# Altium PCB RisPardazandeh Tester PCB.PcbDoc
Units mm, origin at the board's own origin, x right, y up, seen from the top; angles counter-clockwise.
Board outline 66.09 x 97.03 mm, 2 copper layers (Top Layer, Bottom Layer); 46 components, 58 nets, 224 pads, 1 vias.
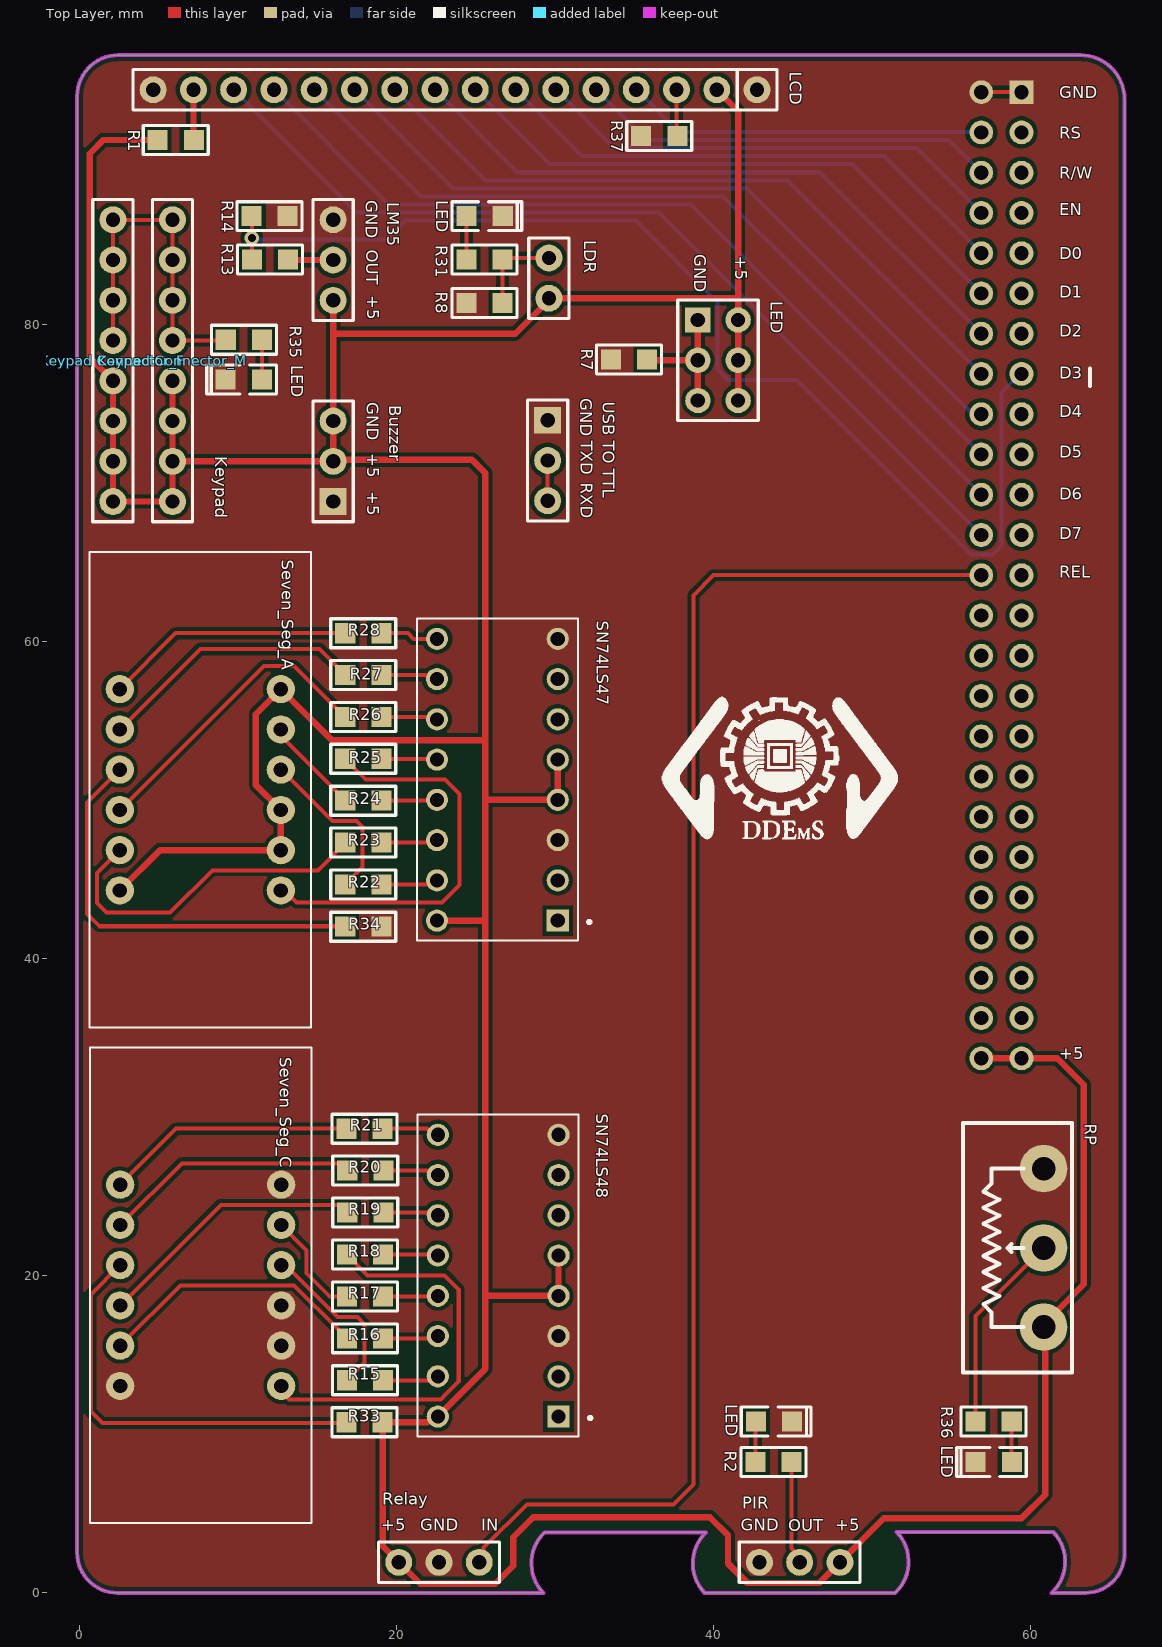
[diagram p0: Top Layer view]
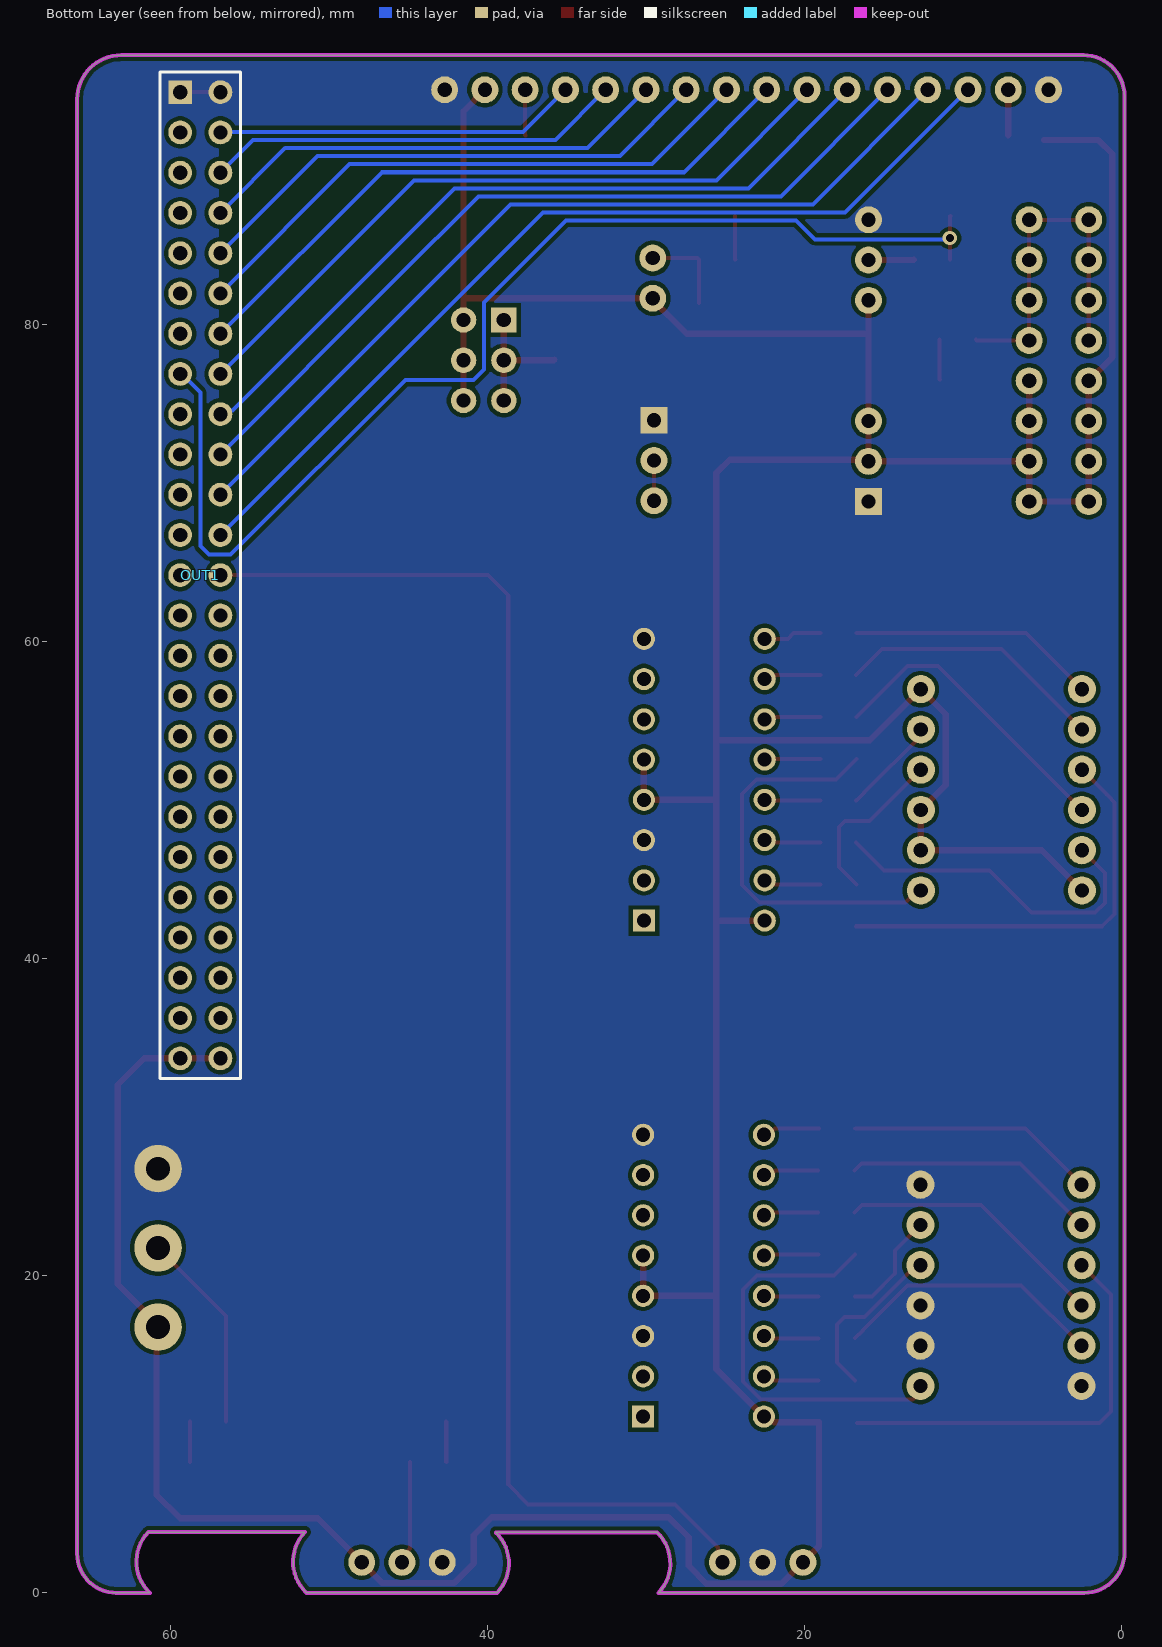
[diagram p1: Bottom Layer view, seen from below]

## Layer stack, top to bottom
Top Solder: solder mask 0.0102, Solder Resist, Dk 3.5
Top Layer: signal copper 0.0356
Dielectric 1: dielectric 0.32, FR-4, Dk 4.8
Bottom Layer: signal copper 0.0356
Bottom Solder: solder mask 0.0102, Solder Resist, Dk 3.5

## Board outline
2.368,0 29.235,0 cw(c31.178,1.867) 29.312,3.81 39.497,3.81 ccw(c41.364,1.867) 39.421,0 51.435,0 51.46,0.025 ccw(c49.593,1.968) 51.537,3.835 61.417,3.835 cw(c59.474,1.968) 61.341,0.025 61.316,0 63.449,0 63.432,0 ccw(c63.432,2.481) 65.913,2.481 65.913,94.243 ccw(c63.128,94.243) 63.128,97.028 2.423,97.028 ccw(c2.423,94.427) -0.178,94.427 -0.178,2.546 ccw(c2.368,2.546)

## Design rules (kind name [scope] priority, off if disabled: settings)
Clearance [All] p1: gap=0.254 ignorepadtopadclearanceinfootprint=FALSE
PolygonConnect PolygonConnect_4 [All vs IsNamedPolygon('GND_L02_P003')] p1: connectstyle=Direct reliefconductorwidth=0.254 reliefentries=4 polygonreliefangle="90 Angle" airgapwidth=0.254
PolygonConnect PolygonConnect_3 [All vs IsNamedPolygon('GND_L01_P002')] p2: connectstyle=Direct reliefconductorwidth=0.254 reliefentries=4 polygonreliefangle="90 Angle" airgapwidth=0.254
PolygonConnect PolygonConnect_2 [All vs IsNamedPolygon('NONET_L-01_P-001')] p3: connectstyle=Direct reliefconductorwidth=0.254 reliefentries=4 polygonreliefangle="90 Angle" airgapwidth=0.254
PolygonConnect PolygonConnect_1 [All vs IsNamedPolygon('NONET_L-01_P-001')] p4: connectstyle=Direct reliefconductorwidth=0.254 reliefentries=4 polygonreliefangle="90 Angle" airgapwidth=0.254
PolygonConnect [All] p5: connectstyle=Relief reliefconductorwidth=0.254 reliefentries=4 polygonreliefangle="90 Angle" airgapwidth=0.254
RoutingVias [All] p1: holewidth=0.5 width=0.9 viastyle="Through Hole" minholewidth=0.5 minwidth=0.9 maxholewidth=0.5 maxwidth=0.9
SolderMaskExpansion [All] p1: expansion=0.102 istentingtop=FALSE
Width [All] p1: maxlimit=1 minlimit=0.254 preferedwidth=0.5
30 further rules are at their usual default settings.

## Classes and differential pairs
component class Sheet2: OUT1
component class Sheet1: Buzzer buzzer "Keypad Connector_F" "Keypad Connector_M" LCD LDR LED PIR R1 R2 R7 R8 R13 R14 R15 R16 R17 R18 R19 R20 R21 R22 R23 R24 R25 R26 R27 R28 R31 R33 R34 R35 R36 R37 Relay RP Seven_Seg_A Seven_Seg_C SN74LS47 SN74LS48 "USB TO TTL"

## Components (designator, comment, footprint, x,y, rotation, side; value= is the part's Value field where it differs from the comment)
Buzzer "HDR-1X3" HDR-1X3_M#1 15.979,68.859 r90 top
"Keypad Connector_F" "HDR-1X8" HDR-1X8_M 2.083,86.639 r270 top
"Keypad Connector_M" "HDR-1X8" HDR-1X8 5.842,86.639 r270 top
LCD "HDR-1X16" HDR-1X16 42.723,94.844 r180 top
LDR "HDR-1X2" HDR-1X2 29.591,84.226 r270 top
LED "Comment" HDR-3X2 38.989,80.315 r270 top
LED "LED-SMD" "LED 0805G" 57.658,8.255 r180 top (schematic designator LED5)
LED "LED-SMD" "LED 0805G" 10.338,76.556 r180 top (schematic designator LED4)
LED "LED-SMD" "LED 0805G" 25.534,86.868 r0 top (schematic designator LED2)
LED "LED-SMD" "LED 0805G" 43.79,10.82 r0 top (schematic designator LED1)
LM35 "HDR-1X3" HDR-1X3_M#2 15.979,86.639 r270 top
OUT1 "Header 25X2" HDR2X25 59.411,94.691 r270 bottom
PIR "HDR-1X3" HDR-1X3_M#2 42.875,1.93 r0 top
R1 "470R" "R 0805" 6.045,91.668 r180 top
R2 "470R" "R 0805" 43.764,8.255 r180 top
R7 "470R" "R 0805" 34.646,77.826 r0 top
R8 "470R" "R 0805" 25.527,81.382 r0 top
R13 "470R" "R 0805" 11.989,84.125 r180 top
R14 "470R" "R 0805" 11.963,86.868 r180 top
R15 "470R" "R 0805" 17.983,13.415 r180 top
R16 "470R" "R 0805" 17.983,16.06 r180 top
R17 "470R" "R 0805" 17.983,18.705 r180 top
R18 "470R" "R 0805" 17.983,21.35 r180 top
R19 "470R" "R 0805" 18.009,23.996 r180 top
R20 "470R" "R 0805" 18.009,26.645 r180 top
R21 "470R" "R 0805" 17.958,29.286 r180 top
R22 "470R" "R 0805" 17.881,44.704 r180 top
R23 "470R" "R 0805" 17.881,47.346 r180 top
R24 "470R" "R 0805" 17.881,49.987 r180 top
R25 "470R" "R 0805" 17.881,52.629 r180 top
R26 "470R" "R 0805" 17.881,55.27 r180 top
R27 "470R" "R 0805" 17.881,57.912 r180 top
R28 "470R" "R 0805" 17.881,60.554 r180 top
R31 "470R" "R 0805" 25.527,84.125 r180 top
R33 "470R" "R 0805" 17.958,10.77 r0 top
R34 "470R" "R 0805" 17.882,42.037 r0 top
R35 "470R" "R 0805" 10.345,79.07 r0 top
R36 "470R" "R 0805" 57.651,10.82 r180 top
R37 "470R" "R 0805" 36.551,91.923 r180 top
Relay "HDR-1X3" HDR-1X3#1 20.117,1.93 r0 top
RP "5K" WH148 60.808,21.768 r90 top
Seven_Seg_A "LDQ-M3604RI" LDQ-M3604RI 7.595,50.673 r270 top
Seven_Seg_C "LDQ-M3604RI" LDQ-M3604RI 7.62,19.406 r270 top
SN74LS47 "1571552-4" TE_1571552-4 26.34,51.308 r180 top
SN74LS48 "1571552-4" TE_1571552-4 26.391,20.015 r180 top
"USB TO TTL" "HDR-1X3" HDR-1X3#2 29.515,73.99 r270 top

## Footprints (in the part's own frame and the unit in brackets; to place one, negate y for a bottom-side part, rotate by r counter-clockwise, add the part's x,y. Pads: shape width x height; smd on the part's side, far side on the other; paste and mask are expansions set on the pad)
HDR2X25 [mm] "Connector; Header; 25x2 Position"
  rect 1.5x1.5 hole 0.9: 1(0,0)
  round 1.5 hole 0.9: 2(0,2.54) 3(2.54,0) 4(2.54,2.54) 5(5.08,0) 6(5.08,2.54) 7(7.62,0) 8(7.62,2.54) 9(10.16,0) 10(10.16,2.54) 11(12.7,0) 12(12.7,2.54) 13(15.24,0) 14(15.24,2.54) 15(17.78,0) 16(17.78,2.54) 17(20.32,0) 18(20.32,2.54) 19(22.86,0) 20(22.86,2.54) 21(25.4,0) 22(25.4,2.54) 23(27.94,0) 24(27.94,2.54) 25(30.48,0) 26(30.48,2.54) 27(33.02,0) 28(33.02,2.54) 29(35.56,0) 30(35.56,2.54) 31(38.1,0) 32(38.1,2.54) 33(40.64,0) 34(40.64,2.54) 35(43.18,0) 36(43.18,2.54) 37(45.72,0) 38(45.72,2.54) 39(48.26,0) 40(48.26,2.54) 41(50.8,0) 42(50.8,2.54) 43(53.34,0) 44(53.34,2.54) 45(55.88,0) 46(55.88,2.54) 47(58.42,0) 48(58.42,2.54) 49(60.96,0) 50(60.96,2.54)
  silkscreen extent -1.27,-1.27 62.23,3.81
HDR-1X2 [mm] "إإصë£¬2½إ"
  round 1.7 hole 0.9: 1(0,0) 2(2.54,0)
  silkscreen extent -1.27,-1.27 3.81,1.27, body extent -1.27,-1.27 3.81,1.27, height 8.5
HDR-1X3#1 [mm] "إإصë£¬3½إ"
  round 1.7 hole 0.9: 1(0,0) 2(2.54,0) 3(5.08,0)
  silkscreen extent -1.27,-1.27 6.35,1.27, body extent -1.27,-1.27 6.35,1.27, height 8.5
HDR-1X3#2 [mm] "إإصë£¬3½إ"
  rect 1.7x1.7 hole 0.9: 1(0,0)
  round 1.7 hole 0.9: 2(2.54,0) 3(5.08,0)
  silkscreen extent -1.27,-1.27 6.35,1.27, body extent -1.27,-1.27 6.35,1.27, height 8.5
HDR-1X3_M#1 [mm] "إإؤ¸£¬3½إ"
  rect 1.7x1.7 hole 0.9: 1(0,0)
  round 1.7 hole 0.9: 2(2.54,0) 3(5.08,0)
  silkscreen extent -1.27,-1.27 6.35,1.27, body extent -1.27,-1.27 6.35,1.27, height 8.5
HDR-1X3_M#2 [mm] "إإؤ¸£¬3½إ"
  round 1.7 hole 0.9: 1(0,0) 2(2.54,0) 3(5.08,0)
  silkscreen extent -1.27,-1.27 6.35,1.27, body extent -1.27,-1.27 6.35,1.27, height 8.5
HDR-1X8 [mm] "إإصë£¬8½إ"
  round 1.7 hole 0.9: 1(0,0) 2(2.54,0) 3(5.08,0) 4(7.62,0) 5(10.16,0) 6(12.7,0) 7(15.24,0) 8(17.78,0)
  silkscreen extent -1.27,-1.27 19.05,1.27, body extent -1.27,-1.27 19.05,1.27, height 8.5
HDR-1X8_M [mm] "إإؤ¸£¬8½إ"
  round 1.7 hole 0.9: 1(0,0) 2(2.54,0) 3(5.08,0) 4(7.62,0) 5(10.16,0) 6(12.7,0) 7(15.24,0) 8(17.78,0)
  silkscreen extent -1.27,-1.27 19.05,1.27, body extent -1.27,-1.27 19.05,1.27, height 8.5
HDR-1X16 [mm] "إإصë£¬16½إ"
  round 1.7 hole 0.9: 1(0,0) 2(2.54,0) 3(5.08,0) 4(7.62,0) 5(10.16,0) 6(12.7,0) 7(15.24,0) 8(17.78,0) 9(20.32,0) 10(22.86,0) 11(25.4,0) 12(27.94,0) 13(30.48,0) 14(33.02,0) 15(35.56,0) 16(38.1,0)
  silkscreen extent -1.27,-1.27 39.37,1.27, body extent -1.27,-1.27 39.37,1.27, height 8.5
HDR-3X2 [mm] "ث«إإإإصë£¬3x2½إ"
  rect 1.6x1.6 hole 0.9: 1(0,0)
  round 1.6 hole 0.9: 2(0,2.54) 3(2.54,0) 4(2.54,2.54) 5(5.08,0) 6(5.08,2.54)
  silkscreen extent -1.27,-1.27 6.35,3.81, body extent -1.27,-1.27 6.35,3.81, height 8.5
LDQ-M3604RI [mil]
  round 70 hole 35.43: 1(-250,-200) 2(-150,-200) 3(-50,-200) 4(50,-200) 5(150,-200) 6(250,-200) 7(250,200) 8(150,200) 9(50,200) 10(-50,200) 11(-150,200) 12(-250,200)
  silkscreen extent -591,-276 591,276, body extent -591,-276 591,276, height 283
"LED 0805G" [mil] "ï؟½ï؟½ة«0805LED"
  rect 50x50 smd: 1(-45,0) 2(45,0)
  silkscreen extent -81,-36 92,36, body extent -39,-25 39,25, height 32
"R 0805" [mm] "1/8Wï؟½ï؟½ئ¬ï؟½ï؟½ï؟½ï؟½"
  rect 1.27x1.27 smd: 1(-1.143,0) 2(1.143,0)
  silkscreen extent -2.05,-0.91 2.05,0.91, body extent -1,-0.62 1,0.63, height 0.5
TE_1571552-4 [mil]
  rect 55x55 hole 35: 1(-150,350)
  round 55 hole 35: 2(-150,250) 3(-150,150) 4(-150,50) 5(-150,-50) 6(-150,-150) 7(-150,-250) 8(-150,-350) 9(150,-350) 10(150,-250) 11(150,-150) 12(150,-50) 13(150,50) 14(150,150) 15(150,250) 16(150,350)
  silkscreen extent -232,-400 200,400, body extent -198,-398 198,398
WH148 [mm] "ï؟½ï؟½ï؟½ï؟½ï؟½ï؟½ï؟½إµï؟½خ»ï؟½ï؟½"
  round 3 hole 1.5: 1(-5,0) 2(5,0) ADJ(0,0)
  silkscreen extent -7.87,-1.78 7.87,5.08, body extent -7.87,-20.58 7.87,4.98, height 20.04

## Part data
Buzzer LM35 PIR Relay "USB TO TTL": library part "Header 3", "3P Connector", BOM名称=3P接插件, 学习资源=www.ooocke.com, 版权归属=源创客
"Keypad Connector_F" "Keypad Connector_M": library part "Header 8", "8P Connector", BOM名称=8P接插件, 学习资源=www.ooocke.com, 版权归属=源创客
LCD: library part "Header 16", "16P Connector", BOM名称=16P接插件, 学习资源=www.ooocke.com, 版权归属=源创客
LDR: library part "Header 2", "2P Connector", BOM名称=2P接插件, 学习资源=www.ooocke.com, 版权归属=源创客
LED LED LED LED: "Patch LED", BOM名称=贴片LED, 学习资源=www.ooocke.com, 版权归属=源创客
OUT1: "Header, 25-Pin, Dual row", LatestRevisionDate=17-Jul-2002, LatestRevisionNote="Re-released for DXP Platform.", Publisher="Altium Limited"
R1 R2 R7 R8 R13 R14 R15 R16 R17 R18 R19 R20 R21 R22 R23 R24 R25 R26 R27 R28 R31 R33 R34 R35 R36 R37: library part R, "Chip resistor", BOM名称="Chip resistor", 学习资源=www.ooocke.com, 版权归属=源创客
RP: library part RP-THD, "Plug-in potentiometer", BOM名称=插件电位器, 学习资源=www.ooocke.com, 版权归属=源创客
Seven_Seg_A Seven_Seg_C: "Display, Seven Segment, 9.2MM, Red", Package=None, Availability=Warning, Check_prices=https://www.snapeda.com/parts/LDQ-M3604RI/Lumex/view-part/2854791/?ref=eda, MF=Lumex, MP=LDQ-M3604RI, Price=None, SnapEDA_Link=https://www.snapeda.com/parts/LDQ-M3604RI/Lumex/view-part/2854791/?ref=snap
SN74LS47 SN74LS48: "Row Spacing 2.54 mm Pitch Through Hole Dip Socket", Package=None, Availability=Unavailable, MP=1571552-4, Price=None

## Via types
v1: diameter 0.9, hole 0.5, Top Layer to Bottom Layer, 1 vias

## Nets (pads, with @x,y where several pads share a name; then routed paths per layer and width w, separated by ;. In a path a pad name is that pad's centre, name@x,y a point inside that pad or via, vN(x,y) a via of type N, cw(c..) or ccw(c..) an arc to the next point about the centre after c; other vN are vias at no path point)
+5: "Keypad Connector_F.5" "Keypad Connector_F.6" "Keypad Connector_F.7" "Keypad Connector_F.8" "Keypad Connector_M.5" "Keypad Connector_M.6" "Keypad Connector_M.7" "Keypad Connector_M.8" Buzzer.2 Buzzer.3 LCD.2 LDR.2 LED.2@41.529,80.315 LED.4 LED.6 LM35.3 OUT1.49 OUT1.50 PIR.3 R1.2 R33.2 Relay.1 RP.1 Seven_Seg_A.6 Seven_Seg_A.8 Seven_Seg_A.9 Seven_Seg_A.12 SN74LS47.4 SN74LS47.5 SN74LS47.16 SN74LS48.4 SN74LS48.5 SN74LS48.16 | length 326.8
  Top Layer w0.4: Seven_Seg_A.6 5.055,46.863 Seven_Seg_A.8 Seven_Seg_A.9 11.1,50.978 11.1,55.448 Seven_Seg_A.12 15.901,53.797 25.578,53.797 ; R1.2 1.473,91.669 0.61,90.805 0.61,77.953 2.083,76.479 2.083,73.939 2.083,71.399 2.083,68.859 5.842,68.859 5.842,71.399 ; 5.842,76.479 5.842,73.939 5.842,71.399 ; LM35.3 15.979,79.451 ; SN74LS47.16 25.578,42.418 ; LDR.2 41.453,81.686 41.529,81.61 ; LDR.2@29.642,81.636 27.457,79.451 15.979,79.451 ; SN74LS47.5 SN74LS47.4 25.578,50.038 ; SN74LS48.5 SN74LS48.4 25.705,18.745 25.578,18.872 ; LCD.2 41.529,93.497 41.529,81.61 ; LED.6 LED.4 41.529,80.315 41.529,81.61 ; OUT1.50 OUT1.49 61.671,33.731 63.348,32.055 63.348,19.482 60.909,17.043 60.909,6.198 59.411,4.699 50.724,4.699 PIR.3 46.651,0.626 42.122,0.626 40.894,1.854 40.894,3.632 39.751,4.775 28.6,4.775 27.33,3.505 27.33,1.702 26.21,0.581 21.466,0.581 Relay.1 19.101,2.946 R33.2 21.916,10.77 22.271,11.125 SN74LS48.16 25.578,14.122 25.578,18.872 ; 5.842,71.399 Buzzer.2 ; Buzzer.2 16.081,71.501 24.74,71.501 25.578,70.663 25.578,53.797 ; Buzzer.2 Buzzer.3 15.979,79.451 ; 25.578,18.872 25.578,42.418 ; 25.578,42.418 25.578,50.038 ; 25.578,50.038 25.578,53.797
A_A: R24.2 Seven_Seg_A.11 | length 6.2
  Top Layer w0.254: Seven_Seg_A.11 12.675,54.076 16.231,50.521 16.231,50.495 R24.2 R24.2@16.764,49.987
A_B: R25.2 Seven_Seg_A.7 | length 25.9
  Top Layer w0.254: Seven_Seg_A.7 12.889,44.323 13.651,43.561 22.851,43.561 23.952,44.662 23.952,50.419 23.038,51.333 18.034,51.333 R25.2
A_C: R26.2 Seven_Seg_A.4 | length 19.3
  Top Layer w0.254: Seven_Seg_A.4 11.608,58.496 13.513,58.496 R26.2
A_D: R27.2 Seven_Seg_A.2 | length 17
  Top Layer w0.254: Seven_Seg_A.2 7.595,59.563 15.113,59.563 R27.2@16.764,57.912
A_E: R28.2 Seven_Seg_A.1 | length 15.7
  Top Layer w0.254: Seven_Seg_A.1 6.045,60.554 R28.2
A_F: R22.2 Seven_Seg_A.10 | length 10.7
  Top Layer w0.254: Seven_Seg_A.10 15.926,48.692 17.45,48.692 17.831,48.311 17.831,45.796 R22.2
A_G: R23.2 Seven_Seg_A.5 | length 21.7
  Top Layer w0.254: Seven_Seg_A.5 1.067,45.415 1.067,43.536 1.676,42.926 5.69,42.926 8.357,45.593 15.011,45.593 R23.2@16.764,47.346
C_A: R17.2 Seven_Seg_C.11 | length 6.9
  Top Layer w0.254: Seven_Seg_C.11 14.3,21.616 14.3,20.168 15.763,18.705 R17.2
C_B: R18.2 Seven_Seg_C.7 | length 26
  Top Layer w0.254: Seven_Seg_C.7 12.7,12.7 13.123,12.277 13.198,12.202 22.509,12.202 cw(c22.581,11.125) 22.652,12.202 22.765,12.202 22.84,12.277 22.984,12.421 23.901,13.338 23.901,19.152 23.012,20.041 18.15,20.041 R18.2
C_C: R19.2 Seven_Seg_C.4 | length 17.9
  Top Layer w0.254: Seven_Seg_C.4@2.044,17.639 8.89,24.486 16.376,24.486 R19.2
C_D: R20.2 Seven_Seg_C.2 | length 16.1
  Top Layer w0.254: Seven_Seg_C.2 6.426,27.102 16.408,27.102 R20.2
C_E: R21.2 Seven_Seg_C.1 | length 15.7
  Top Layer w0.254: Seven_Seg_C.1 6.071,29.286 R21.2
C_F: R15.2 Seven_Seg_C.10 | length 10.8
  Top Layer w0.254: Seven_Seg_C.10 12.962,20.676 16.239,17.399 17.501,17.399 17.958,16.942 17.958,14.532 R15.2
C_G: R16.2 Seven_Seg_C.5 | length 17.3
  Top Layer w0.254: Seven_Seg_C.5 6.35,19.406 13.514,19.406 16.332,16.587 16.332,16.568 16.822,16.078 R16.2@16.841,16.078
GND: "USB TO TTL.1" Buzzer.1 LCD.1 LCD.16 LED.2@9.195,76.556 LED.2@26.677,86.868 LED.2@44.933,10.82 LED.2@56.515,8.255 LM35.1 OUT1.1 OUT1.2 PIR.1 R7.1 R8.1 R14.1 R34.2 R37.2 Relay.2 RP.2 Seven_Seg_C.6 Seven_Seg_C.8 Seven_Seg_C.9 Seven_Seg_C.12 SN74LS47.3 SN74LS47.8 SN74LS48.3 SN74LS48.8 | length 2.5
  Top Layer w0.254: OUT1.2 OUT1.1
LCD_D0: LCD.7 OUT1.10 | length 33.7
  Bottom Layer w0.254: LCD.7 31.674,90.653 50.749,90.653 OUT1.10
LCD_D1: LCD.8 OUT1.12 | length 37.3
  Bottom Layer w0.254: LCD.8 29.642,90.145 48.717,90.145 OUT1.12
LCD_D2: LCD.9 OUT1.14 | length 40.8
  Bottom Layer w0.254: LCD.9 27.61,89.637 46.685,89.637 OUT1.14
LCD_D3: LCD.10 OUT1.16 | length 44.4
  Bottom Layer w0.254: LCD.10 25.578,89.129 44.653,89.129 OUT1.16
LCD_D4: LCD.11 OUT1.18 | length 48
  Bottom Layer w0.254: LCD.11 23.546,88.621 42.088,88.621 56.099,74.61 56.632,74.61 OUT1.18
LCD_D5: LCD.12 OUT1.20 | length 51.6
  Bottom Layer w0.254: LCD.12 21.514,88.113 40.589,88.113 45.872,82.829 OUT1.20
LCD_D6: LCD.13 OUT1.22 | length 55.2
  Bottom Layer w0.254: LCD.13 19.482,87.605 38.557,87.605 OUT1.22
LCD_D7: LCD.14 OUT1.24 | length 58.8
  Bottom Layer w0.254: LCD.14 17.45,87.097 36.525,87.097 OUT1.24
LCD_EN: LCD.6 OUT1.8 | length 30.1
  Bottom Layer w0.254: LCD.6 33.706,91.161 52.781,91.161 OUT1.8
LCD_R/W: LCD.5 OUT1.6 | length 26.5
  Bottom Layer w0.254: LCD.5 35.738,91.669 54.813,91.669 OUT1.6
LCD_RS: LCD.4 OUT1.4 | length 22.9
  Bottom Layer w0.254: LCD.4 37.77,92.177 56.845,92.177 OUT1.4
LM_OUT: OUT1.15 R13.2 R14.2 | length 73.4
  Top Layer w0.254: R14.2 10.846,86.843 v1(10.846,85.484) R13.2
  Bottom Layer w0.254: v1(10.846,85.484) 10.921,85.408 19.368,85.408 20.549,86.589 35.077,86.589 40.234,81.432 40.234,77.191 40.894,76.53 45.202,76.53 56.226,65.507 57.582,65.507 58.141,66.065 58.141,75.743 59.309,76.911 OUT1.15
"NetKeypad Connector_F_1": "Keypad Connector_F.1" "Keypad Connector_F.2" "Keypad Connector_F.3" "Keypad Connector_F.4" "Keypad Connector_M.1" "Keypad Connector_M.2" "Keypad Connector_M.3" "Keypad Connector_M.4" R35.1 | length 22.4
  Top Layer w0.254: 2.083,79.019 2.083,81.559 2.083,84.099 2.083,86.639 5.842,86.639 5.842,84.099 5.842,81.559 5.842,79.019 9.151,79.019 R35.1
NetLCD_15: LCD.15 R1.1 | length 2.9
  Top Layer w0.254: R1.1@7.163,91.974 R1.1@7.188,91.948
  Top Layer w0.4: R1.1@7.163,91.974 LCD.15
NetLDR_1: LDR.1 R8.2 R31.1 | length 5.7
  Top Layer w0.254: R8.2 R31.1 26.771,84.226 LDR.1
NetLED1_1: LED.1@42.647,10.82 R2.2 | length 2.6
  Top Layer w0.254: R2.2 42.621,10.795 LED.1@42.647,10.82
NetLED2_1: LED.1@24.391,86.868 R31.2 | length 2.7
  Top Layer w0.254: R31.2 24.391,84.133 LED.1@24.391,86.868
NetLED4_1: LED.1@11.481,76.556 R35.2 | length 2.5
  Top Layer w0.254: LED.1@11.481,76.556 11.488,76.563 R35.2
NetLED5_1: LED.1@58.801,8.255 R36.1 | length 2.6
  Top Layer w0.254: R36.1 58.794,8.262 LED.1@58.801,8.255
NetLED_1: LED.1@38.989,80.315 LED.3 LED.5 R7.2 | length 8.3
  Top Layer w0.4: R7.2 35.839,77.775 LED.3 ; LED.5 LED.3 ; LED.1@38.989,80.315 LED.3
NetLM35_2: LM35.2 R13.1 | length 2.9
  Top Layer w0.4: R13.1 13.157,84.099 LM35.2
NetPIR_2: PIR.2 R2.1 | length 6.5
  Top Layer w0.254: R2.1 44.907,2.802 45.415,2.294 PIR.2
NetR15_1: R15.1 SN74LS48.15 | length 3.6
  Top Layer w0.254: R15.1 22.021,13.415 22.271,13.665 SN74LS48.15
NetR16_1: R16.1 SN74LS48.14 | length 3.5
  Top Layer w0.254: R16.1 22.435,16.06 SN74LS48.14
NetR17_1: R17.1 SN74LS48.13 | length 3.5
  Top Layer w0.254: R17.1 22.541,18.705 SN74LS48.13
NetR18_1: R18.1 SN74LS48.12 | length 3.5
  Top Layer w0.254: R18.1 22.515,21.35 SN74LS48.12
NetR19_1: R19.1 SN74LS48.11 | length 3.5
  Top Layer w0.254: R19.1 22.41,23.996 SN74LS48.11
NetR20_1: R20.1 SN74LS48.10 | length 3.5
  Top Layer w0.254: R20.1 21.86,26.645 21.921,26.584 22.362,26.584 SN74LS48.10
NetR21_1: R21.1 SN74LS48.9 | length 3.6
  Top Layer w0.254: R21.1 21.89,29.286 22.271,28.905 SN74LS48.9
NetR22_1: R22.1 SN74LS47.15 | length 3.6
  Top Layer w0.254: R22.1 21.967,44.704 22.221,44.958 SN74LS47.15
NetR23_1: R23.1 SN74LS47.14 | length 3.6
  Top Layer w0.254: R23.1 22.377,47.346 SN74LS47.14
NetR24_1: R24.1 SN74LS47.13 | length 3.5
  Top Layer w0.254: R24.1 22.479,49.987 SN74LS47.13
NetR25_1: R25.1 SN74LS47.12 | length 3.5
  Top Layer w0.254: R25.1 22.479,52.629 SN74LS47.12
NetR26_1: R26.1 SN74LS47.11 | length 3.6
  Top Layer w0.254: R26.1 22.377,55.27 SN74LS47.11
NetR27_1: R27.1 SN74LS47.10 | length 3.6
  Top Layer w0.254: R27.1 21.81,57.912 21.845,57.877 22.311,57.877 SN74LS47.10
NetR28_1: R28.1 SN74LS47.9 | length 3.7
  Top Layer w0.254: R28.1 20.701,60.554 21.057,60.198 SN74LS47.9
NetR33_1: R33.1 Seven_Seg_C.3 | length 26.3
  Top Layer w0.254: 1.411,10.705 0.686,11.43 0.686,18.821 Seven_Seg_C.3 ; 1.422,10.719 R33.1@16.711,10.719
NetR34_1: R34.1 Seven_Seg_A.3 | length 26.6
  Top Layer w0.254: Seven_Seg_A.3 0.914,50.343 0.457,49.885 0.457,42.85 1.245,42.062 R34.1@16.764,42.062
NetR36_2: R36.2 RP.ADJ | length 12.7
  Top Layer w0.254: R36.2 56.508,17.468 RP.ADJ
"NetUSB TO TTL_2": "USB TO TTL.2" "USB TO TTL.3" | length 2.5
  Top Layer w0.254: 29.515,68.91 29.515,71.45
RELAY: OUT1.26 Relay.3 | length 90.7
  Top Layer w0.254: Relay.3 25.473,2.207 25.473,2.867 28.194,5.588 37.465,5.588 38.71,6.833 38.71,62.941 39.98,64.211 OUT1.26
VEE: LCD.3 R37.1 | length 2.9
  Top Layer w0.254: R37.1@37.617,91.948 37.643,91.973 LCD.3
pads on no net: OUT1.3 OUT1.5 OUT1.7 OUT1.9 OUT1.11 OUT1.13 OUT1.17 OUT1.19 OUT1.21 OUT1.23 OUT1.25 OUT1.27 OUT1.28 OUT1.29 OUT1.30 OUT1.31 OUT1.32 OUT1.33 OUT1.34 OUT1.35 OUT1.36 OUT1.37 OUT1.38 OUT1.39 OUT1.40 OUT1.41 OUT1.42 OUT1.43 OUT1.44 OUT1.45 OUT1.46 OUT1.47 OUT1.48 SN74LS47.1 SN74LS47.2 SN74LS47.6 SN74LS47.7 SN74LS48.1 SN74LS48.2 SN74LS48.6 SN74LS48.7

## Polygon pours and split planes (outlines as drawn)
GND on Bottom Layer "GND_L02_P003" (solid, remove dead copper, pour order 3): -0.023,97.02 0.028,96.969 65.941,96.969 65.941,0.068 65.991,0.017 65.89,-0.085 61.445,-0.034 61.47,3.776 52.25,3.802 52.275,-0.034 38.864,-0.085 38.864,3.776 29.314,3.776 29.314,-0.085 -0.099,-0.085
GND on Top Layer "GND_L01_P002" (solid, remove dead copper, pour order 2): -0.152,97.053 -0.102,97.003 65.811,97.003 65.811,0.102 65.862,0.051 65.761,-0.051 61.316,0 61.341,3.81 52.121,3.835 52.146,0 38.735,-0.051 38.735,3.81 29.185,3.81 29.185,-0.051 -0.229,-0.051

## Keep-outs
Keep-Out Layer:
  lines w0.254: 29.312,3.81 ccw(c31.178,1.867) 29.235,0 2.368,0 cw(c2.368,2.546) -0.178,2.546 -0.178,94.427 cw(c2.423,94.427) 2.423,97.028 63.128,97.028 cw(c63.128,94.243) 65.913,94.243 65.913,2.481 cw(c63.432,2.481) 63.432,0 ; 29.337,3.81 39.497,3.81 ccw(c41.364,1.867) 39.421,0 ; 39.446,0 51.435,0 ; 51.46,0.025 ccw(c49.593,1.969) 51.537,3.835 61.392,3.835 ; 61.316,0 63.449,0 ; 61.341,0.025 ccw(c59.474,1.969) 61.417,3.835

## Other copper
Bottom Layer:
  pour cut-out: 9.703,94.844 35.385,94.613 37.795,92.202 56.947,92.202 56.947,66.599 36.449,87.097 17.52,87.097

## Silkscreen, mask and mechanical layers (free items; w line width, h text height)
Top Overlay:
  drawing of 30 lines, arcs and shapes, not listed
  text "GND" at 61.796,94.069 h1.3
  text "RS" at 61.796,91.504 h1.3
  text "R/W" at 61.796,88.963 h1.3
  text "GND" at 17.769,87.884 h1.3 r270
  text "EN" at 61.796,86.662 h1.3
  text "OUT" at 17.82,84.734 h1.3 r270
  text "GND" at 38.495,84.455 h1.3 r270
  text "+5" at 41.112,84.379 h1.3 r270
  text "D0" at 61.796,83.884 h1.3
  text "+5" at 17.871,81.864 h1.3 r270
  text "D1" at 61.796,81.481 h1.3
  text "D2" at 61.796,78.992 h1.3
  text "D3" at 61.796,76.351 h1.3
  text "GND" at 31.307,75.362 h1.3 r270
  text "GND" at 17.845,75.133 h1.3 r270
  text "D4" at 61.796,73.912 h1.3
  text "TXD" at 31.344,72.695 h1.3 r270
  text "+5" at 17.871,71.907 h1.3 r270
  text "Keypad" at 8.294,71.707 h1.3 r270
  text "D5" at 61.796,71.362 h1.3
  text "RXD" at 31.344,70.053 h1.3 r270
  text "+5" at 17.871,69.52 h1.3 r270
  text "D6" at 61.796,68.72 h1.3
  text "D7" at 61.796,66.215 h1.3
  text "REL" at 61.796,63.802 h1.3
  text "+5" at 61.796,33.414 h1.3
  text "+5" at 18.999,3.672 h1.3
  text "GND" at 21.463,3.672 h1.3
  text "GND" at 41.681,3.672 h1.3
  text "+5" at 47.65,3.672 h1.3
  text "IN" at 25.324,3.658 h1.3
  text "OUT" at 44.679,3.647 h1.3
Mechanical 1:
  lines w0.254: 5.918,77.8 39.954,77.8